# Altium PCB senior_board_rev1.PcbDoc
Units mil, origin at the board's own origin, x right, y up, seen from the top; angles counter-clockwise.
Board outline 6000 x 4000 mil, 2 copper layers (Top Layer, Bottom Layer); 323 components, 182 nets, 1254 pads, 8 vias.
Unrouted connection lines stored in the file: 718.
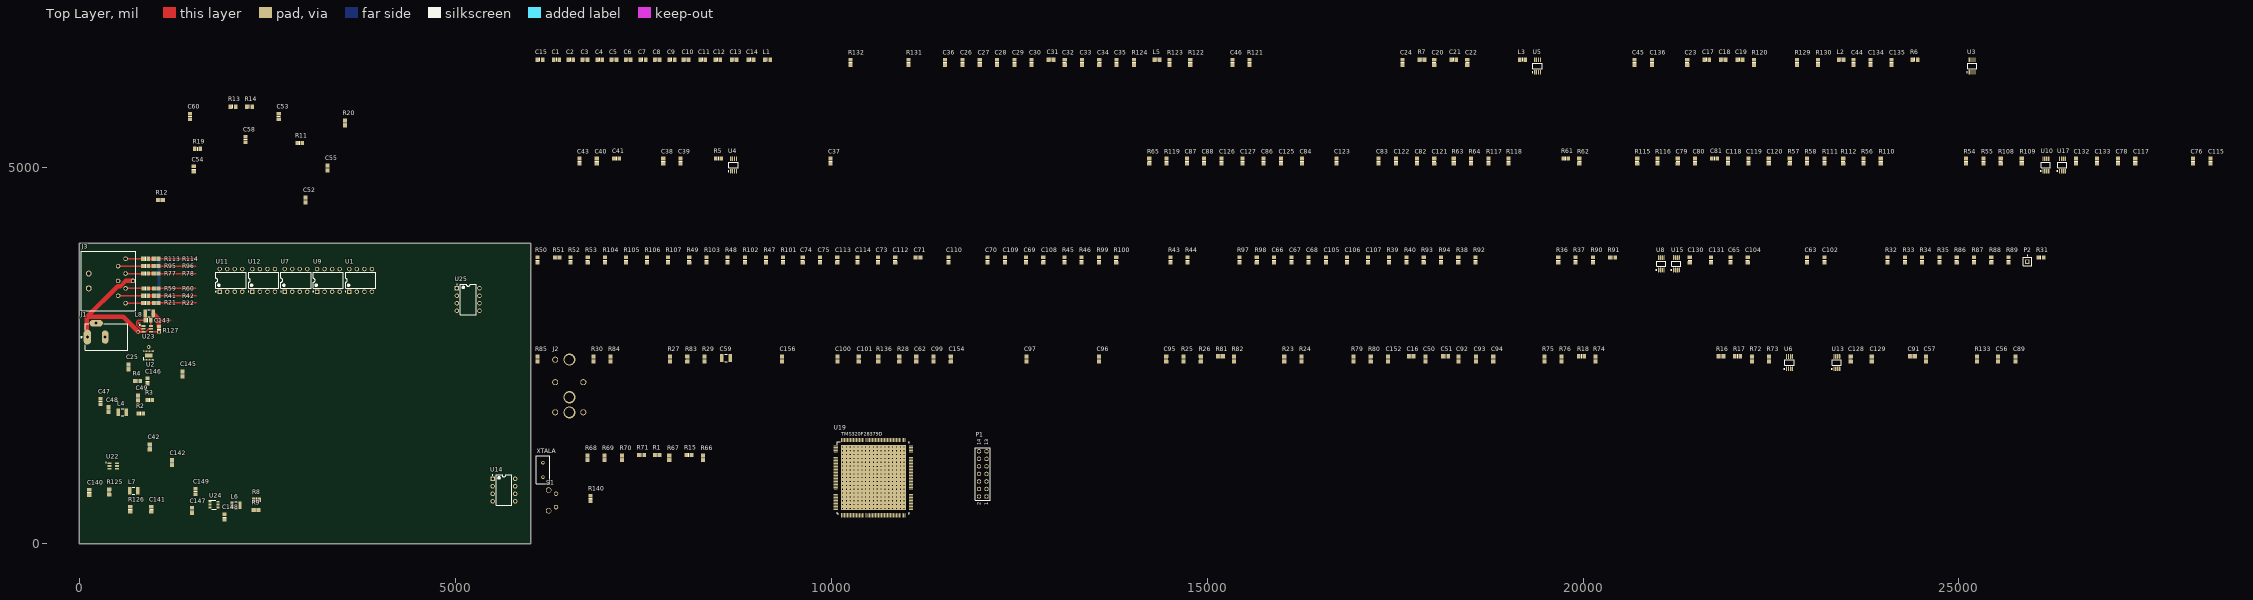
[diagram p0: Top Layer view]
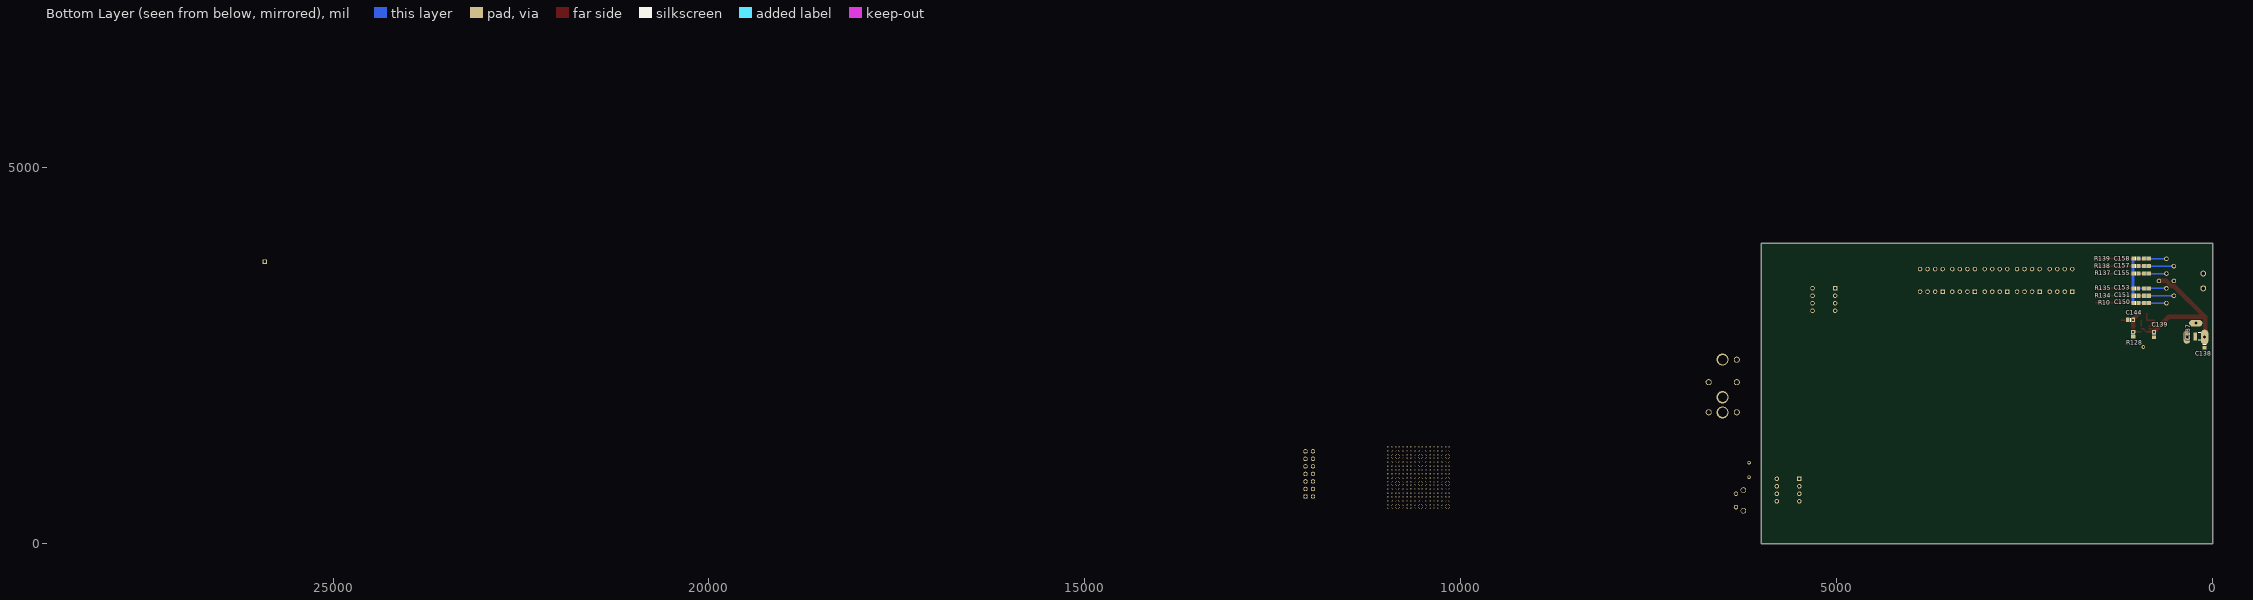
[diagram p1: Bottom Layer view, seen from below]

## Layer stack, top to bottom
Top Solder: solder mask 0.4, Solder Resist, Dk 3.5
Top Layer: signal copper 1.4
Dielectric 1: dielectric 12.6, FR-4, Dk 4.8
Bottom Layer: signal copper 1.4
Bottom Solder: solder mask 0.4, Solder Resist, Dk 3.5

## Board outline
0,0 6000,0 6000,4000 0,4000

## Design rules (kind name [scope] priority, off if disabled: settings)
Clearance [All] p1: gap=10 ignorepadtopadclearanceinfootprint=FALSE except(0: Arc-Hole Track-Hole SMDPad-Hole THPad-Hole Via-Hole Fill-Hole Poly-Hole Region-Hole Text-Hole; 5: SMDPad-SMDPad)
PolygonConnect [All] p1: connectstyle=Relief reliefconductorwidth=10 reliefentries=4 polygonreliefangle="90 Angle" airgapwidth=10
RoutingVias [All] p1: holewidth=28 width=50 viastyle="Through Hole" minholewidth=28 minwidth=50 maxholewidth=28 maxwidth=50
SolderMaskExpansion [All] p1: expansion=4
Width [All] p1: maxlimit=60 minlimit=10 preferedwidth=20 bottomlayer_minwidth=20 minimp=50.000000 maximp=50.000000 favimp=50.000000
30 further rules are at their usual default settings.

## Components (designator, comment, footprint, x,y, rotation, side; value= is the part's Value field where it differs from the comment)
C1 "Cap" 6-0805_N 6345,6440 r0 top value=10uF
C2 "Cap" 6-0805_N 6535,6440 r0 top value=10uF
C3 "Cap" 6-0805_N 6725,6440 r0 top value=100nF
C4 "Cap" 6-0805_N 6920,6440 r0 top value=100nF
C5 "Cap" 6-0805_N 7110,6440 r0 top value=100nF
C6 "Cap" 6-0805_N 7300,6440 r0 top value=100nF
C7 "Cap" 6-0805_N 7495,6440 r0 top value=100nF
C8 "Cap" 6-0805_N 7685,6440 r0 top value=100nF
C9 "Cap" 6-0805_N 7880,6440 r0 top value=100nF
C10 "Cap" 6-0805_N 8070,6440 r0 top value=100nF
C11 "Cap" 6-0805_N 8290,6440 r0 top value=100nF
C12 "Cap" 6-0805_N 8490,6440 r0 top value=100nF
C13 "Cap" 6-0805_N 8710,6440 r0 top value=100nF
C14 "Cap" 6-0805_N 8930,6440 r0 top value=100nF
C15 "Cap" 6-0805_N 6125,6440 r0 top value=10uF
C16 "Cap" 6-0805_N 17715,2495 r0 top value=470p
C17 "Cap" 6-0805_N 21645,6440 r0 top value=2.2uF
C18 "Cap" 6-0805_N 21865,6440 r0 top value=100nF
C19 "Cap" 6-0805_N 22085,6440 r0 top value=100nF
C20 "Cap" 6-0805_N 18020,6405 r90 top value=2.2uF
C21 "Cap" 6-0805_N 18280,6440 r0 top value=100nF
C22 "Cap" 6-0805_N 18460,6405 r90 top value=100nF
C23 "Cap" 6-0805_N 21385,6405 r90 top value=2.2uF
C24 "Cap" 6-0805_N 17600,6405 r90 top value=2.2uF
C25 "Cap" 6-0805_N 650,2354.57 r90 top value=6.8uF
C26 "Cap" 6-0805_N 11745,6405 r90 top value=10uF
C27 "Cap" 6-0805_N 11975,6405 r90 top value=2.2uF
C28 "Cap" 6-0805_N 12205,6405 r90 top value=2.2uF
C29 "Cap" 6-0805_N 12435,6405 r90 top value=2.2uF
C30 "Cap" 6-0805_N 12665,6405 r90 top value=2.2uF
C31 "Cap" 6-0805_N 12925,6440 r0 top value=2.2uF
C32 "Cap" 6-0805_N 13105,6405 r90 top value=2.2uF
C33 "Cap" 6-0805_N 13335,6405 r90 top value=2.2uF
C34 "Cap" 6-0805_N 13565,6405 r90 top value=2.2uF
C35 "Cap" 6-0805_N 13795,6405 r90 top value=2.2uF
C36 "Cap" 6-0805_N 11515,6405 r90 top value=22uF
C37 "Cap" 6-0805_N 9990,5090 r90 top value=100nF
C38 "Cap" 6-0805_N 7765,5090 r90 top value=2.2uF
C39 "Cap" 6-0805_N 7995,5090 r90 top value=100nF
C40 "Cap" 6-0805_N 6880,5090 r90 top value=1uF
C41 "Cap" 6-0805_N 7145,5125 r0 top value=1uF
C42 "Cap" 6-0805_N 935,1290 r90 top value=1uF
C43 "Cap" 6-0805_N 6650,5090 r90 top value=1uF
C44 "Cap" 6-0805_N 23595,6405 r90 top value=22uF
C45 "Cap" 6-0805_N 20685,6405 r90 top value=100nF
C46 "Cap" 6-0805_N 15335,6405 r90 top value=22uF
C47 "Cap" 6-0805_N 280,1895 r90 top value=22uF
C48 "Cap" 6-0805_N 385,1785 r90 top value=1uF
C49 "Cap" 6-0805_N 780,1940 r90 top value=33uF
C50 "Cap" 6-0805_N 17905,2460 r90 top value=1n
C51 "Cap" 6-0805_N 18170,2495 r0 top value=180p
C52 "Cap" 6-0805_N 3005,4575 r90 top value=10nF
C53 "Cap" 6-0805_N 2650,5685 r90 top value=10nF
C54 "Cap" 6-0805_N 1520,4985 r90 top value=8.2nF
C55 "Cap" 6-0805_N 3300,5000.43 r90 top value=18nF
C56 "Cap" 6-0805_N 25520,2460 r90 top value=100nF
C57 "Cap" 6-0805_N 24560,2460 r90 top value=8.2nF
C58 "Cap" 6-0805_N 2210,5380 r90 top value=100nF
C59 "Cap" C1210_N 8600,2470 r0 top value=1uF
C60 "Cap" 6-0805_N 1470,5685 r90 top value=100nF
C62 "Cap" 6-0805_N 11130,2460 r90 top value=220nF
C63 "Cap" 6-0805_N 22980,3775 r90 top value=100nF
C65 "Cap" 6-0805_N 21960,3775 r90 top value=100nF
C66 "Cap" 6-0805_N 15890,3775 r90 top value=470p
C67 "Cap" 6-0805_N 16120,3775 r90 top value=1n
C68 "Cap" 6-0805_N 16350,3775 r90 top value=180p
C69 "Cap" 6-0805_N 12590,3775 r90 top value=10nF
C70 "Cap" 6-0805_N 12080,3775 r90 top value=10nF
C71 "Cap" 6-0805_N 11155,3810 r0 top value=100nF
C73 "Cap" 6-0805_N 10620,3775 r90 top value=220nF
C74 "Cap" 6-0805_N 9620,3775 r90 top value=8.2nF
C75 "Cap" 6-0805_N 9850,3775 r90 top value=18nF
C76 "Cap" 6-0805_N 28115,5090 r90 top value=100nF
C78 "Cap" 6-0805_N 27115,5090 r90 top value=100nF
C79 "Cap" 6-0805_N 21260,5090 r90 top value=470p
C80 "Cap" 6-0805_N 21490,5090 r90 top value=1n
C81 "Cap" 6-0805_N 21750,5125 r0 top value=180p
C82 "Cap" 6-0805_N 17790,5090 r90 top value=10nF
C83 "Cap" 6-0805_N 17280,5090 r90 top value=10nF
C84 "Cap" 6-0805_N 16260,5090 r90 top value=100nF
C86 "Cap" 6-0805_N 15750,5090 r90 top value=220nF
C87 "Cap" 6-0805_N 14730,5090 r90 top value=8.2nF
C88 "Cap" 6-0805_N 14960,5090 r90 top value=18nF
C89 "Cap" 6-0805_N 25750,2460 r90 top value=100nF
C91 "Cap" 6-0805_N 24380,2495 r0 top value=100nF
C92 "Cap" 6-0805_N 18345,2460 r90 top value=470p
C93 "Cap" 6-0805_N 18575,2460 r90 top value=1n
C94 "Cap" 6-0805_N 18805,2460 r90 top value=180p
C95 "Cap" 6-0805_N 14455,2460 r90 top value=10nF
C96 "Cap" 6-0805_N 13560,2460 r90 top value=10nF
C97 "Cap" 6-0805_N 12595,2460 r90 top value=100nF
C99 "Cap" 6-0805_N 11360,2460 r90 top value=220nF
C100 "Cap" 6-0805_N 10085,2460 r90 top value=8.2nF
C101 "Cap" 6-0805_N 10365,2460 r90 top value=18nF
C102 "Cap" 6-0805_N 23210,3775 r90 top value=100nF
C104 "Cap" 6-0805_N 22190,3775 r90 top value=100nF
C105 "Cap" 6-0805_N 16580,3775 r90 top value=470p
C106 "Cap" 6-0805_N 16860,3775 r90 top value=1n
C107 "Cap" 6-0805_N 17140,3775 r90 top value=180p
C108 "Cap" 6-0805_N 12820,3775 r90 top value=10nF
C109 "Cap" 6-0805_N 12310,3775 r90 top value=10nF
C110 "Cap" 6-0805_N 11560,3775 r90 top value=100nF
C112 "Cap" 6-0805_N 10850,3775 r90 top value=220nF
C113 "Cap" 6-0805_N 10080,3775 r90 top value=8.2nF
C114 "Cap" 6-0805_N 10350,3775 r90 top value=18nF
C115 "Cap" 6-0805_N 28345,5090 r90 top value=100nF
C117 "Cap" 6-0805_N 27345,5090 r90 top value=100nF
C118 "Cap" 6-0805_N 21930,5090 r90 top value=470p
C119 "Cap" 6-0805_N 22200,5090 r90 top value=1n
C120 "Cap" 6-0805_N 22470,5090 r90 top value=180p
C121 "Cap" 6-0805_N 18020,5090 r90 top value=10nF
C122 "Cap" 6-0805_N 17510,5090 r90 top value=10nF
C123 "Cap" 6-0805_N 16720,5090 r90 top value=100nF
C125 "Cap" 6-0805_N 15980,5090 r90 top value=220nF
C126 "Cap" 6-0805_N 15190,5090 r90 top value=8.2nF
C127 "Cap" 6-0805_N 15470,5090 r90 top value=18nF
C128 "Cap" 6-0805_N 23560,2460 r90 top value=100nF
C129 "Cap" 6-0805_N 23840,2460 r90 top value=100nF
C130 "Cap" 6-0805_N 21420,3775 r90 top value=100nF
C131 "Cap" 6-0805_N 21700,3775 r90 top value=100nF
C132 "Cap" 6-0805_N 26555,5090 r90 top value=100nF
C133 "Cap" 6-0805_N 26835,5090 r90 top value=100nF
C134 "Cap" 6-0805_N 23825,6405 r90 top value=0.1uF
C135 "Cap" 6-0805_N 24105,6405 r90 top value=36pF
C136 "Cap" 6-0805_N 20915,6405 r90 top value=36pF
C137 "Cap Pol1" C1210_N 172.09,2760 r0 bottom value=1uF
C138 "Cap" 6-0805_N 104.37,2645 r90 bottom value=100nF
C139 "Cap" 6-0805_N 780,2785 r90 bottom value=10uF
C140 "Cap" 6-0805_N 130,685 r90 top value=100nF
C141 "Cap" 6-0805_N 955,460 r90 top value=47uF
C142 "Cap" 6-0805_N 1230,1080 r90 top value=10uF
C143 "Cap" 6-0805_N 910.43,2973.9 r180 top value=100nF
C144 "Cap" 6-0805_N 1090,2980 r180 bottom value=47uF
C145 "Cap" 6-0805_N 1370,2259.57 r90 top value=100nF
C146 "Cap" 6-0805_N 905,2165 r90 top value=1uF
C147 "Cap" 6-0805_N 1495,442.4 r90 top value=100nF
C148 "Cap" 6-0805_N 1930,356.97 r90 top value=10uF
C149 "Cap" 6-0805_N 1545,696.97 r90 top value=47uF
C150 "Cap" 6-0805_N 880,3205 r0 bottom value=1u
C151 "Cap" 6-0805_N 880,3300 r0 bottom value=1u
C152 "Cap" 6-0805_N 17405,2460 r90 top value=100nF
C153 "Cap" 6-0805_N 880.16,3398.43 r0 bottom value=1u
C154 "Cap" 6-0805_N 11590,2460 r90 top value=10u
C155 "Cap" 6-0805_N 880,3595 r0 bottom value=1u
C156 "Cap" 6-0805_N 9345,2460 r90 top value=100nF
C157 "Cap" 6-0805_N 880,3693.7 r0 bottom value=1u
C158 "Cap" 6-0805_N 880,3795 r0 bottom value=1u
J1 "PJ-002AH" CUI_PJ-002AH 104.37,2750 r0 top
J2 "SN37A12A" SN37A12A 6515,1750 r90 top
J3 "8 pin DIN CONN" "8 Pin DIN Conn" 22.87,3890.55 r270 top
L1 "Inductor" 6-0805_N 9150,6440 r0 top value=220R
L2 "Inductor" 6-0805_N 23435,6440 r0 top value=60R
L3 "Inductor" 6-0805_N 19195,6440 r0 top value=60R
L4 "Inductor" 14-1210 570,1750 r0 top value=4.7uH
L5 "Inductor" 6-0805_N 14335,6440 r0 top value=220R
L6 "Inductor" 14-1210 2081.85,512.4 r0 top value=2.2uH
L7 "Inductor" 14-1210 720,705 r0 top value=2.2uH
L8 "Inductor" 14-1210 926.85,3065 r0 top value=3.3uH
P1 "Header 7X2" HDR2X7 12065,630 r90 top
P2 "Jack Insert?" PIN1 25910,3755 r0 top
R1 "" 6-0805_N 7685,1180 r0 top value=4.8k
R2 "" 6-0805_N 815,1735 r0 top value=280k
R3 "" 6-0805_N 935,1915 r0 top value=102k
R4 "" 6-0805_N 770.43,2165 r0 top value=52.3k
R5 "" 6-0805_N 8500,5125 r0 top value=1k
R6 "" 6-0805_N 24415,6440 r0 top value=100mOhm
R7 "" 6-0805_N 17860,6440 r0 top value=100mOhm
R8 "" 6-0805_N 2355.43,587.4 r0 top value=5.62k
R9 "" 6-0805_N 2350,452.4 r0 top value=10k
R10 "" 6-0805_N 1020,3205 r0 bottom value=47k
R11 "" 6-0805_N 2930,5330 r0 top value=2.49k
R12 "" 6-0805_N 1075,4575 r0 top value=1.02k
R13 "" 6-0805_N 2040,5815 r0 top value=2.49k
R14 "" 6-0805_N 2260,5815 r0 top value=1.02k
R15 "" 6-0805_N 8105,1180 r0 top value=1.2k
R16 "" 6-0805_N 21835,2495 r0 top value=330
R17 "" 6-0805_N 22055,2495 r0 top value=12
R18 "" 6-0805_N 19980,2495 r0 top value=5
R19 "" 6-0805_N 1570,5255 r0 top value=12.1k
R20 "" 6-0805_N 3530,5600 r90 top value=3.57k
R21 "" 6-0805_N 880.43,3205 r0 top value=9.53k
R22 "" 6-0805_N 1020.43,3205 r0 top value=10k
R23 "" 6-0805_N 16025,2460 r90 top value=5
R24 "" 6-0805_N 16255,2460 r90 top value=12
R25 "" 6-0805_N 14685,2460 r90 top value=1.2k
R26 "" 6-0805_N 14915,2460 r90 top value=330
R27 "" 6-0805_N 7855,2460 r90 top value=4.8k
R28 "" 6-0805_N 10905,2460 r90 top value=10k
R29 "" 6-0805_N 8315,2460 r90 top value=10k
R30 "" 6-0805_N 6835,2460 r90 top value=1.2k
R31 "" 6-0805_N 26090,3810 r0 top value=4.8k
R32 "" 6-0805_N 24050,3775 r90 top value=2.49k
R33 "" 6-0805_N 24280,3775 r90 top value=1.02k
R34 "" 6-0805_N 24510,3775 r90 top value=2.49k
R35 "" 6-0805_N 24740,3775 r90 top value=1.02k
R36 "" 6-0805_N 19670,3775 r90 top value=330
R37 "" 6-0805_N 19900,3775 r90 top value=12
R38 "" 6-0805_N 18340,3775 r90 top value=5
R39 "" 6-0805_N 17420,3775 r90 top value=12.1k
R40 "" 6-0805_N 17650,3775 r90 top value=3.57k
R41 "" 6-0805_N 880.43,3300 r0 top value=9.53k
R42 "" 6-0805_N 1020.43,3300 r0 top value=10k
R43 "" 6-0805_N 14510,3775 r90 top value=5
R44 "" 6-0805_N 14740,3775 r90 top value=12
R45 "" 6-0805_N 13100,3775 r90 top value=1.2k
R46 "" 6-0805_N 13330,3775 r90 top value=330
R47 "" 6-0805_N 9130,3775 r90 top value=4.8k
R48 "" 6-0805_N 8620,3775 r90 top value=1.2k
R49 "" 6-0805_N 8110,3775 r90 top value=4.8k
R50 "" 6-0805_N 6090,3775 r90 top value=2.49k
R51 "" 6-0805_N 6355,3810 r0 top value=1.02k
R52 "" 6-0805_N 6530,3775 r90 top value=2.49k
R53 "" 6-0805_N 6760,3775 r90 top value=1.02k
R54 "" 6-0805_N 25095,5090 r90 top value=330
R55 "" 6-0805_N 25325,5090 r90 top value=12
R56 "" 6-0805_N 23730,5090 r90 top value=5
R57 "" 6-0805_N 22750,5090 r90 top value=12.1k
R58 "" 6-0805_N 22980,5090 r90 top value=3.57k
R59 "" 6-0805_N 880.59,3398.43 r0 top value=9.53k
R60 "" 6-0805_N 1020.59,3398.43 r0 top value=10k
R61 "" 6-0805_N 19770,5125 r0 top value=5
R62 "" 6-0805_N 19950,5090 r90 top value=12
R63 "" 6-0805_N 18280,5090 r90 top value=1.2k
R64 "" 6-0805_N 18510,5090 r90 top value=330
R65 "" 6-0805_N 14230,5090 r90 top value=4.8k
R66 "" 6-0805_N 8295,1145 r90 top value=1.2k
R67 "" 6-0805_N 7845,1145 r90 top value=4.8k
R68 "" 6-0805_N 6755,1145 r90 top value=2.49k
R69 "" 6-0805_N 6985,1145 r90 top value=1.02k
R70 "" 6-0805_N 7215,1145 r90 top value=2.49k
R71 "" 6-0805_N 7475,1180 r0 top value=1.02k
R72 "" 6-0805_N 22245,2460 r90 top value=330
R73 "" 6-0805_N 22475,2460 r90 top value=12
R74 "" 6-0805_N 20165,2460 r90 top value=5
R75 "" 6-0805_N 19485,2460 r90 top value=12.1k
R76 "" 6-0805_N 19715,2460 r90 top value=3.57k
R77 "" 6-0805_N 880,3595 r0 top value=9.53k
R78 "" 6-0805_N 1020,3595 r0 top value=10k
R79 "" 6-0805_N 16945,2460 r90 top value=5
R80 "" 6-0805_N 17175,2460 r90 top value=12
R81 "" 6-0805_N 15175,2495 r0 top value=1.2k
R82 "" 6-0805_N 15355,2460 r90 top value=330
R83 "" 6-0805_N 8085,2460 r90 top value=4.8k
R84 "" 6-0805_N 7065,2460 r90 top value=1.2k
R85 "" 6-0805_N 6090,2460 r90 top value=4.8k
R86 "" 6-0805_N 24970,3775 r90 top value=2.49k
R87 "" 6-0805_N 25200,3775 r90 top value=1.02k
R88 "" 6-0805_N 25430,3775 r90 top value=2.49k
R89 "" 6-0805_N 25660,3775 r90 top value=1.02k
R90 "" 6-0805_N 20130,3775 r90 top value=330
R91 "" 6-0805_N 20390,3810 r0 top value=12
R92 "" 6-0805_N 18570,3775 r90 top value=5
R93 "" 6-0805_N 17880,3775 r90 top value=12.1k
R94 "" 6-0805_N 18110,3775 r90 top value=3.57k
R95 "" 6-0805_N 880,3693.7 r0 top value=9.53k
R96 "" 6-0805_N 1020,3693.7 r0 top value=10k
R97 "" 6-0805_N 15430,3775 r90 top value=5
R98 "" 6-0805_N 15660,3775 r90 top value=12
R99 "" 6-0805_N 13560,3775 r90 top value=1.2k
R100 "" 6-0805_N 13790,3775 r90 top value=330
R101 "" 6-0805_N 9360,3775 r90 top value=4.8k
R102 "" 6-0805_N 8850,3775 r90 top value=1.2k
R103 "" 6-0805_N 8340,3775 r90 top value=4.8k
R104 "" 6-0805_N 6990,3775 r90 top value=2.49k
R105 "" 6-0805_N 7270,3775 r90 top value=1.02k
R106 "" 6-0805_N 7550,3775 r90 top value=2.49k
R107 "" 6-0805_N 7830,3775 r90 top value=1.02k
R108 "" 6-0805_N 25555,5090 r90 top value=330
R109 "" 6-0805_N 25835,5090 r90 top value=12
R110 "" 6-0805_N 23960,5090 r90 top value=5
R111 "" 6-0805_N 23210,5090 r90 top value=12.1k
R112 "" 6-0805_N 23460,5090 r90 top value=3.57k
R113 "" 6-0805_N 880,3792.13 r0 top value=9.53k
R114 "" 6-0805_N 1020,3792.13 r0 top value=10k
R115 "" 6-0805_N 20720,5090 r90 top value=5
R116 "" 6-0805_N 20990,5090 r90 top value=12
R117 "" 6-0805_N 18740,5090 r90 top value=1.2k
R118 "" 6-0805_N 19010,5090 r90 top value=330
R119 "" 6-0805_N 14460,5090 r90 top value=4.8k
R120 "" 6-0805_N 22275,6405 r90 top value=1M
R121 "" 6-0805_N 15565,6405 r90 top value=2.2k
R122 "" 6-0805_N 14775,6405 r90 top value=100
R123 "" 6-0805_N 14500,6405 r90 top value=4.7k
R124 "" 6-0805_N 14025,6405 r90 top value=4.7k
R125 "" 6-0805_N 395,690 r90 top value=34k
R126 "" 6-0805_N 675,460 r90 top value=10k
R127 "" 6-0805_N 1055.43,2855 r90 top value=56.2k
R128 "" 6-0805_N 1055,2788.7 r90 bottom value=10k
R129 "" 6-0805_N 22845,6405 r90 top value=10k
R130 "" 6-0805_N 23125,6405 r90 top value=10k
R131 "" 6-0805_N 11025,6405 r90 top value=10k
R132 "" 6-0805_N 10255,6405 r90 top value=10k
R133 "" 6-0805_N 25240,2460 r90 top value=11k
R134 "" 6-0805_N 1020,3300 r0 bottom value=47k
R135 "" 6-0805_N 1020.59,3398.43 r0 bottom value=47k
R136 "" 6-0805_N 10625,2460 r90 top value=11k
R137 "" 6-0805_N 1020,3595 r0 bottom value=47k
R138 "" 6-0805_N 1020,3695 r0 bottom value=47k
R139 "" 6-0805_N 1020,3795 r0 bottom value=47k
R140 "" 6-0805_N 6795,605 r90 top value=9.53k
S1 "B3F-3152" B3F-3152 6338.43,489.06 r90 top
U1 "NE5532P" TI-P8 3740,3505 r90 top
U2 "TPS63710DRR" DRR0012C 920,2505 r90 top value=Value
U3 "OPA350EA/250" TI-DGK8_N 25175,6355 r90 top
U4 "REF5030IDGKT" TI-DGK8_N 8700,5040 r90 top
U5 "OPA350EA/250" TI-DGK8_N 19395,6355 r90 top
U6 "THS4531IDGKR" TI-DGK8_N 22745,2410 r90 top
U7 "NE5532P" TI-P8 2880,3505 r90 top
U8 "THS4531IDGKR" TI-DGK8_N 21040,3725 r90 top
U9 "NE5532P" TI-P8 3310,3505 r90 top
U10 "THS4531IDGKR" TI-DGK8_N 26155,5040 r90 top
U11 "NE5532P" TI-P8 2015,3505 r90 top
U12 "NE5532P" TI-P8 2450,3505 r90 top
U13 "THS4531IDGKR" TI-DGK8_N 23375,2410 r90 top
U14 "NE5532P" TI-P8 5645,715.43 r0 top
U15 "THS4531IDGKR" TI-DGK8_N 21240,3725 r90 top
U17 "THS4531IDGKR" TI-DGK8_N 26375,5040 r90 top
U19 "TMS320F28379DPTP" PTP0176F_N 10560,880 r0 top value=Value
U22 "TPS563200DDCR" SOT95P280X110-6N 450,1035 r0 top
U23 "TPS563200DDCR" SOT95P280X110-6N 900,2860 r0 top
U24 "TPS561208DDCR" DDC0006A 1790,522.4 r0 top value=Value
U25 "NE5532P" TI-P8 5170,3250 r0 top
XTALA "ATS100B-E" "ATS XTAL" 6165,887.87 r90 top

## Footprints (in the part's own frame and the unit in brackets; to place one, negate y for a bottom-side part, rotate by r counter-clockwise, add the part's x,y. Pads: shape width x height; smd on the part's side, far side on the other; paste and mask are expansions set on the pad)
6-0805_N [mm] "Chip Resistor, Body 2.0x1.2mm, IPC Medium Density"
  rect 1.2x1.4 smd: 1(-0.9,0) 2(0.9,0)
  silkscreen extent 0,-0.6 0,0.6, body extent -1.07,-0.7 1.07,0.7, height 0.7
"8 Pin DIN Conn" [mm]
  round 2 hole 1.3: 1(7.5,2.54) 2(12.5,2.54)
  round 1.524 hole 1: 3(5,12.5) 4(10,12.5) 5(15,12.5) 6(2.5,15) 7(7.5,15) 8(12.5,15) 9(17.5,15) 10(10,17.5)
  silkscreen extent 0,0 20,18.5
14-1210 [mm] "Chip Resistor, Body 3.2x2.5mm, IPC High Density"
  rect 1.1x2.6 smd: 1(-1.35,0) 2(1.35,0)
  silkscreen extent -0.4,-1.2 0.4,1.2, body extent -1.68,-1.32 1.68,1.32, height 0.9
"ATS XTAL" [mm]
  round 1.2 hole 0.7: 1(0,0) 2(4.88,0)
  silkscreen extent -2.25,-2.25 7.13,2.25
B3F-3152 [mm]
  round 1.524 hole 1: 1(0,0) 2(4.5,0)
  round 1.9 hole 1.5: 3(-1.25,2.5) 4(5.75,2.5)
C1210_N [mm] "Chip Capacitor, Body 3.2x2.5mm, IPC Medium Density"
  rect 1.3x2.7 smd: 1(-1.45,0) 2(1.45,0)
  silkscreen extent -0.4,-1.25 0.4,1.25, body extent -1.7,-1.35 1.7,1.35, height 1.5
CUI_PJ-002AH [mm]
  oval 2.5x5 hole 1: 1(0,0)
  oval 2.25x4.5 hole 1: 2(6,0)
  oval 4.5x2.25 hole 1: 3(3,4.7)
  silkscreen extent -2.2,-4.5 13.7,4.5
DDC0006A [mm]
  rect 1x0.6 smd paste+0 mask+0.051: 1(-1.375,0.95) 2(-1.375,0) 3(-1.375,-0.95) 4(1.375,-0.95) 5(1.375,0) 6(1.375,0.95)
  silkscreen extent -1.75,-1.52 0.7,1.53, body extent 0,0 0.25,0.25, height 0.25
DRR0012C [mm]
  rect 0.5x0.25 smd paste+0 mask+0.051: 1(-1.45,1.25) 2(-1.45,0.75) 3(-1.45,0.25) 4(-1.45,-0.25) 5(-1.45,-0.75) 6(-1.45,-1.25) 7(1.45,-1.25) 8(1.45,-0.75) 9(1.45,-0.25) 10(1.45,0.25) 11(1.45,0.75) 12(1.45,1.25)
  rect 1.5x2.5 smd paste-1.237 mask+0.051: 13(0,0)
  silkscreen extent -1.6,-1.65 1.6,1.65, body extent 0,0 0.25,0.25, height 0.25
HDR2X7 [mm] "Connector; Header; 7x2 Position"
  rect 1.5x1.5 hole 0.9: 1(0,0)
  round 1.5 hole 0.9: 2(0,2.54) 3(2.54,0) 4(2.54,2.54) 5(5.08,0) 6(5.08,2.54) 7(7.62,0) 8(7.62,2.54) 9(10.16,0) 10(10.16,2.54) 11(12.7,0) 12(12.7,2.54) 13(15.24,0) 14(15.24,2.54)
  silkscreen extent -1.27,-1.27 16.51,3.81
PIN1 [mm] "Connector; Plug"
  rect 1.5x1.5 hole 0.9: 1(0,0)
  silkscreen extent -1.4,-1.4 1.4,2.17
PTP0176F_N [mm]
  oval 1.45x0.3 smd paste+0 mask+0.051: 1(-12.725,10.75) 2(-12.725,10.25) 3(-12.725,9.75) 4(-12.725,9.25) 5(-12.725,8.75) 6(-12.725,8.25) 7(-12.725,7.75) 8(-12.725,7.25) 9(-12.725,6.75) 10(-12.725,6.25) 11(-12.725,5.75) 12(-12.725,5.25) 13(-12.725,4.75) 14(-12.725,4.25) 15(-12.725,3.75) 16(-12.725,3.25) 17(-12.725,2.75) 18(-12.725,2.25) 19(-12.725,1.75) 20(-12.725,1.25) 21(-12.725,0.75) 22(-12.725,0.25) 23(-12.725,-0.25) 24(-12.725,-0.75) 25(-12.725,-1.25) 26(-12.725,-1.75) 27(-12.725,-2.25) 28(-12.725,-2.75) 29(-12.725,-3.25) 30(-12.725,-3.75) 31(-12.725,-4.25) 32(-12.725,-4.75) 33(-12.725,-5.25) 34(-12.725,-5.75) 35(-12.725,-6.25) 36(-12.725,-6.75) 37(-12.725,-7.25) 38(-12.725,-7.75) 39(-12.725,-8.25) 40(-12.725,-8.75) 41(-12.725,-9.25) 42(-12.725,-9.75) 43(-12.725,-10.25) 44(-12.725,-10.75) 89(12.725,-10.75) 90(12.725,-10.25) 91(12.725,-9.75) 92(12.725,-9.25) 93(12.725,-8.75) 94(12.725,-8.25) 95(12.725,-7.75) 96(12.725,-7.25) 97(12.725,-6.75) 98(12.725,-6.25) 99(12.725,-5.75) 100(12.725,-5.25) 101(12.725,-4.75) 102(12.725,-4.25) 103(12.725,-3.75) 104(12.725,-3.25) 105(12.725,-2.75) 106(12.725,-2.25) 107(12.725,-1.75) 108(12.725,-1.25) 109(12.725,-0.75) 110(12.725,-0.25) 111(12.725,0.25) 112(12.725,0.75) 113(12.725,1.25) 114(12.725,1.75) 115(12.725,2.25) 116(12.725,2.75) 117(12.725,3.25) 118(12.725,3.75) 119(12.725,4.25) 120(12.725,4.75) 121(12.725,5.25) 122(12.725,5.75) 123(12.725,6.25) 124(12.725,6.75) 125(12.725,7.25) 126(12.725,7.75) 127(12.725,8.25) 128(12.725,8.75) 129(12.725,9.25) 130(12.725,9.75) 131(12.725,10.25) 132(12.725,10.75)
  oval 0.3x1.45 smd paste+0 mask+0.051: 45(-10.75,-12.725) 46(-10.25,-12.725) 47(-9.75,-12.725) 48(-9.25,-12.725) 49(-8.75,-12.725) 50(-8.25,-12.725) 51(-7.75,-12.725) 52(-7.25,-12.725) 53(-6.75,-12.725) 54(-6.25,-12.725) 55(-5.75,-12.725) 56(-5.25,-12.725) 57(-4.75,-12.725) 58(-4.25,-12.725) 59(-3.75,-12.725) 60(-3.25,-12.725) 61(-2.75,-12.725) 62(-2.25,-12.725) 63(-1.75,-12.725) 64(-1.25,-12.725) 65(-0.75,-12.725) 66(-0.25,-12.725) 67(0.25,-12.725) 68(0.75,-12.725) 69(1.25,-12.725) 70(1.75,-12.725) 71(2.25,-12.725) 72(2.75,-12.725) 73(3.25,-12.725) 74(3.75,-12.725) 75(4.25,-12.725) 76(4.75,-12.725) 77(5.25,-12.725) 78(5.75,-12.725) 79(6.25,-12.725) 80(6.75,-12.725) 81(7.25,-12.725) 82(7.75,-12.725) 83(8.25,-12.725) 84(8.75,-12.725) 85(9.25,-12.725) 86(9.75,-12.725) 87(10.25,-12.725) 88(10.75,-12.725) 133(10.75,12.725) 134(10.25,12.725) 135(9.75,12.725) 136(9.25,12.725) 137(8.75,12.725) 138(8.25,12.725) 139(7.75,12.725) 140(7.25,12.725) 141(6.75,12.725) 142(6.25,12.725) 143(5.75,12.725) 144(5.25,12.725) 145(4.75,12.725) 146(4.25,12.725) 147(3.75,12.725) 148(3.25,12.725) 149(2.75,12.725) 150(2.25,12.725) 151(1.75,12.725) 152(1.25,12.725) 153(0.75,12.725) 154(0.25,12.725) 155(-0.25,12.725) 156(-0.75,12.725) 157(-1.25,12.725) 158(-1.75,12.725) 159(-2.25,12.725) 160(-2.75,12.725) 161(-3.25,12.725) 162(-3.75,12.725) 163(-4.25,12.725) 164(-4.75,12.725) 165(-5.25,12.725) 166(-5.75,12.725) 167(-6.25,12.725) 168(-6.75,12.725) 169(-7.25,12.725) 170(-7.75,12.725) 171(-8.25,12.725) 172(-8.75,12.725) 173(-9.25,12.725) 174(-9.75,12.725) 175(-10.25,12.725) 176(-10.75,12.725)
  rect 22x22 smd paste-10.987 mask+0.051: 177(0,0)
  round 0.5 / inner round 1.524 / far side round 0.5 hole 0.203 mask+0.051: V(-10.4,-10.4) V(-10.4,-9.1) V(-10.4,-7.8) V(-10.4,-6.5) V(-10.4,-5.2) V(-10.4,-3.9) V(-10.4,-2.6) V(-10.4,-1.3) V(-10.4,0) V(-10.4,1.3) V(-10.4,2.6) V(-10.4,3.9) V(-10.4,5.2) V(-10.4,6.5) V(-10.4,7.8) V(-10.4,9.1) V(-10.4,10.4) V(-9.1,-10.4) V(-9.1,-9.1) V(-9.1,-7.8) V(-9.1,-6.5) V(-9.1,-5.2) V(-9.1,-3.9) V(-9.1,-2.6) V(-9.1,-1.3) V(-9.1,0) V(-9.1,1.3) V(-9.1,2.6) V(-9.1,3.9) V(-9.1,5.2) V(-9.1,6.5) V(-9.1,7.8) V(-9.1,9.1) V(-9.1,10.4) V(-7.8,-10.4) V(-7.8,-9.1) V(-7.8,-7.8) V(-7.8,-6.5) V(-7.8,-5.2) V(-7.8,-3.9) V(-7.8,-2.6) V(-7.8,-1.3) V(-7.8,0) V(-7.8,1.3) V(-7.8,2.6) V(-7.8,3.9) V(-7.8,5.2) V(-7.8,6.5) V(-7.8,7.8) V(-7.8,9.1) V(-7.8,10.4) V(-6.5,-10.4) V(-6.5,-9.1) V(-6.5,-7.8) V(-6.5,-6.5) V(-6.5,-5.2) V(-6.5,-3.9) V(-6.5,-2.6) V(-6.5,-1.3) V(-6.5,0) V(-6.5,1.3) V(-6.5,2.6) V(-6.5,3.9) V(-6.5,5.2) V(-6.5,6.5) V(-6.5,7.8) V(-6.5,9.1) V(-6.5,10.4) V(-5.2,-10.4) V(-5.2,-9.1) V(-5.2,-7.8) V(-5.2,-6.5) V(-5.2,-5.2) V(-5.2,-3.9) V(-5.2,-2.6) V(-5.2,-1.3) V(-5.2,0) V(-5.2,1.3) V(-5.2,2.6) V(-5.2,3.9) V(-5.2,5.2) V(-5.2,6.5) V(-5.2,7.8) V(-5.2,9.1) V(-5.2,10.4) V(-3.9,-10.4) V(-3.9,-9.1) V(-3.9,-7.8) V(-3.9,-6.5) V(-3.9,-5.2) V(-3.9,-3.9) V(-3.9,-2.6) V(-3.9,-1.3) V(-3.9,0) V(-3.9,1.3) V(-3.9,2.6) V(-3.9,3.9) V(-3.9,5.2) V(-3.9,6.5) V(-3.9,7.8) V(-3.9,9.1) V(-3.9,10.4) V(-2.6,-10.4) V(-2.6,-9.1) V(-2.6,-7.8) V(-2.6,-6.5) V(-2.6,-5.2) V(-2.6,-3.8) V(-2.6,-2.6) V(-2.6,-1.3) V(-2.6,0) V(-2.6,1.3) V(-2.6,2.6) V(-2.6,3.8) V(-2.6,5.2) V(-2.6,6.5) V(-2.6,7.8) V(-2.6,9.1) V(-2.6,10.4) V(-1.3,-10.4) V(-1.3,-9.1) V(-1.3,-7.8) V(-1.3,-6.5) V(-1.3,-5.2) V(-1.3,-3.8) V(-1.3,-2.6) V(-1.3,-1.3) V(-1.3,0) V(-1.3,1.3) V(-1.3,2.6) V(-1.3,3.8) V(-1.3,5.2) V(-1.3,6.5) V(-1.3,7.8) V(-1.3,9.1) V(-1.3,10.4) V(0,-10.4) V(0,-9.1) V(0,-7.8) V(0,-6.5) V(0,-5.2) V(0,-3.8) V(0,-2.6) V(0,-1.3) V(0,0) V(0,1.3) V(0,2.6) V(0,3.8) V(0,5.2) V(0,6.5) V(0,7.8) V(0,9.1) V(0,10.4) V(1.3,-10.4) V(1.3,-9.1) V(1.3,-7.8) V(1.3,-6.5) V(1.3,-5.2) V(1.3,-3.8) V(1.3,-2.6) V(1.3,-1.3) V(1.3,0) V(1.3,1.3) V(1.3,2.6) V(1.3,3.8) V(1.3,5.2) V(1.3,6.5) V(1.3,7.8) V(1.3,9.1) V(1.3,10.4) V(2.6,-10.4) V(2.6,-9.1) V(2.6,-7.8) V(2.6,-6.5) V(2.6,-5.2) V(2.6,-3.8) V(2.6,-2.6) V(2.6,-1.3) V(2.6,0) V(2.6,1.3) V(2.6,2.6) V(2.6,3.8) V(2.6,5.2) V(2.6,6.5) V(2.6,7.8) V(2.6,9.1) V(2.6,10.4) V(3.9,-10.4) V(3.9,-9.1) V(3.9,-7.8) V(3.9,-6.5) V(3.9,-5.2) V(3.9,-3.9) V(3.9,-2.6) V(3.9,-1.3) V(3.9,0) V(3.9,1.3) V(3.9,2.6) V(3.9,3.9) V(3.9,5.2) V(3.9,6.5) V(3.9,7.8) V(3.9,9.1) V(3.9,10.4) V(5.2,-10.4) V(5.2,-9.1) V(5.2,-7.8) V(5.2,-6.5) V(5.2,-5.2) V(5.2,-3.9) V(5.2,-2.6) V(5.2,-1.3) V(5.2,0) V(5.2,1.3) V(5.2,2.6) V(5.2,3.9) V(5.2,5.2) V(5.2,6.5) V(5.2,7.8) V(5.2,9.1) V(5.2,10.4) V(6.5,-10.4) V(6.5,-9.1) V(6.5,-7.8) V(6.5,-6.5) V(6.5,-5.2) V(6.5,-3.9) V(6.5,-2.6) V(6.5,-1.3) V(6.5,0) V(6.5,1.3) V(6.5,2.6) V(6.5,3.9) V(6.5,5.2) V(6.5,6.5) V(6.5,7.8) V(6.5,9.1) V(6.5,10.4) V(7.8,-10.4) V(7.8,-9.1) V(7.8,-7.8) V(7.8,-6.5) V(7.8,-5.2) V(7.8,-3.9) V(7.8,-2.6) V(7.8,-1.3) V(7.8,0) V(7.8,1.3) V(7.8,2.6) V(7.8,3.9) V(7.8,5.2) V(7.8,6.5) V(7.8,7.8) V(7.8,9.1) V(7.8,10.4) V(9.1,-10.4) V(9.1,-9.1) V(9.1,-7.8) V(9.1,-6.5) V(9.1,-5.2) V(9.1,-3.9) V(9.1,-2.6) V(9.1,-1.3) V(9.1,0) V(9.1,1.3) V(9.1,2.6) V(9.1,3.9) V(9.1,5.2) V(9.1,6.5) V(9.1,7.8) V(9.1,9.1) V(9.1,10.4) V(10.4,-10.4) V(10.4,-9.1) V(10.4,-7.8) V(10.4,-6.5) V(10.4,-5.2) V(10.4,-3.9) V(10.4,-2.6) V(10.4,-1.3) V(10.4,0) V(10.4,1.3) V(10.4,2.6) V(10.4,3.9) V(10.4,5.2) V(10.4,6.5) V(10.4,7.8) V(10.4,9.1) V(10.4,10.4)
  silkscreen extent -12.2,-12.2 12.2,12.2, body extent 0,0 0.25,0.25, height 0.25
SN37A12A [mil]
  round 80 hole 57: R(400,187) RB(400,-187) S(700,187) T(0,187) TB(0,-187)
SOT95P280X110-6N [mm]
  rect 1.3x0.6 smd: 1(-1.255,0.95) 2(-1.255,0) 3(-1.255,-0.95) 4(1.255,-0.95) 5(1.255,0) 6(1.255,0.95)
  silkscreen extent -2.6,1.15 -2.4,1.35
TI-DGK8_N [mm] "SOP, 8-Leads, Body 3x3mm, Pitch 0.65mm, IPC Medium Density"
  oval 1.6x0.4 smd: 1(-2.1,0.975) 2(-2.1,0.325) 3(-2.1,-0.325) 4(-2.1,-0.975) 5(2.1,-0.975) 6(2.1,-0.325) 7(2.1,0.325) 8(2.1,0.975)
  silkscreen extent -2.22,-1.55 0.9,1.85, body extent -1.55,-1.55 1.55,1.55, height 1.1
TI-P8 [mm] "DIP, 8-Leads, Body 9.59x6.35mm, Pitch 2.54mm"
  rect 1.5x1.5 hole 0.9: 1(-3.81,3.81)
  round 1.5 hole 0.9: 2(-3.81,1.27) 3(-3.81,-1.27) 4(-3.81,-3.81) 5(3.81,-3.81) 6(3.81,-1.27) 7(3.81,1.27) 8(3.81,3.81)
  silkscreen extent -3.93,-5.1 2.65,5.23, body extent -3.95,-5.07 3.95,5.07, height 5.08

## Part data
C1 C2 C3 C4 C5 C6 C7 C8 C9 C10 C11 C12 C13 C14 C15 C16 C17 C18 C19 C20 C21 C22 C23 C24 C25 C26 C27 C28 C29 C30 C31 C32 C33 C34 C35 C36 C37 C38 C39 C40 C41 C42 C43 C44 C45 C46 C47 C48 C49 C50 C51 C52 C53 C54 C55 C56 C57 C58 C59 C60 C62 C63 C65 C66 C67 C68 C69 C70 C71 C73 C74 C75 C76 C78 C79 C80 C81 C82 C83 C84 C86 C87 C88 C89 C91 C92 C93 C94 C95 C96 C97 C99 C100 C101 C102 C104 C105 C106 C107 C108 C109 C110 C112 C113 C114 C115 C117 C118 C119 C120 C121 C122 C123 C125 C126 C127 C128 C129 C130 C131 C132 C133 C134 C135 C136 C138 C139 C140 C141 C142 C143 C144 C145 C146 C147 C148 C149 C150 C151 C152 C153 C154 C155 C156 C157 C158: "Capacitor", LatestRevisionDate=17-Jul-2002, LatestRevisionNote="Re-released for DXP Platform.", PackageDescription="Radial Cap, Thru-Hole; 2 Leads; 0.3 in Pin Spacing", PackageReference=RAD-0.3, Published=8-Jun-2000, Publisher="Altium Limited"
C137: "Polarized Capacitor (Radial)", LatestRevisionDate=17-Jul-2002, LatestRevisionNote="Re-released for DXP Platform.", PackageDescription="Polarized Capacitor (Radial); 2 Leads", PackageReference=RB7.6-15, Published=8-Jun-2000, Publisher="Altium Limited"
P1: "Header, 7-Pin, Dual row", LatestRevisionDate=17-Jul-2002, LatestRevisionNote="Re-released for DXP Platform.", Publisher="Altium Limited"
P2: library part Plug, "Plug", LatestRevisionDate=17-Jul-2002, LatestRevisionNote="Re-released for DXP Platform.", Publisher="Altium Limited"
R1 R2 R3 R4 R5 R6 R7 R8 R9 R10 R11 R12 R13 R14 R15 R16 R17 R18 R19 R20 R21 R22 R23 R24 R25 R26 R27 R28 R29 R30 R31 R32 R33 R34 R35 R36 R37 R38 R39 R40 R41 R42 R43 R44 R45 R46 R47 R48 R49 R50 R51 R52 R53 R54 R55 R56 R57 R58 R59 R60 R61 R62 R63 R64 R65 R66 R67 R68 R69 R70 R71 R72 R73 R74 R75 R76 R77 R78 R79 R80 R81 R82 R83 R84 R85 R86 R87 R88 R89 R90 R91 R92 R93 R94 R95 R96 R97 R98 R99 R100 R101 R102 R103 R104 R105 R106 R107 R108 R109 R110 R111 R112 R113 R114 R115 R116 R117 R118 R119 R120 R121 R122 R123 R124 R125 R126 R127 R128 R129 R130 R131 R132 R133 R134 R135 R136 R137 R138 R139 R140: library part Res3, "Resistor", LatestRevisionDate=29-May-2009, LatestRevisionNote="IPC-7351 Footprint Added.", PackageDescription="Chip Resistor", PackageReference=J1-0603, Published=8-Jun-2000, Publisher="Altium Limited"
U1 U7 U9 U11 U12 U14 U25: "Dual Low-Noise High-Speed Audio Operational Amplifier, 10 to 30 V, 0 to 70 degC, 8-pin DIP (P8), Pb-Free (RoHS)", Manufacturer="Texas Instruments", Supplier Part Number 1=296-1410-5-ND, Total Supply Voltage(Max)(+5V is 5, +/-5V is 10)=30, Total Supply Voltage(Min)(+5V is 5, +/-5V is 10)=10, CMRR(Min)(dB)=70, Code_JEDEC=MS-001, ComponentLink1Description="Manufacturer URL", ComponentLink1URL=http://www.ti.com/, ComponentLink2Description=Datasheet, ComponentLink2URL=http://www.ti.com/lit/ds/symlink/ne5532.pdf, ComponentLink3Description="Package Specification", ComponentLink3URL=http://www.ti.com/litv/pdf/mpdi001b, DatasheetVersion=SLOS075I, Eco-Plan="Pb-Free (RoHS)", GBW(Typ)(MHz)=10, IIB(Max)(pA)=800000, Iq per channel(Max)(mA)=4, Mounting Technology="Through Hole", Number of Channels=2, PackageDescription="8-Pin Plastic In-Line, Body 9.59 x 6.35 mm, Pitch 2.54 mm", PackageReference=P8, PackageVersion="4040082/E, 04/2010", PartNumber=NE5532P, Slew Rate(Typ)(V/us)=9, Sub Family="General Purpose Amplifier, High Supply Voltage Amplifier (>=30V), Low Noise Amp (<=10nV/rtHz)", Supplier 1=Digi-Key, Supplier 2=Farnell, Supplier 3=Farnell, Supplier 4=Newark, Supplier 5=Mouser, Supplier Part Number 2=1106092, Supplier Part Number 3=2119505, Supplier Part Number 4=59K8751, Supplier Part Number 5=595-NE5532P, Vio (25C)(Max)(mV)=4, Vn at 1kHz(Typ)(nV/rtHz)=5
U2 U24: "Imported", Manufacturer="Texas Instruments", Manufacturer_Name="Texas Instruments", RefDes=RefDes, TYPE=TYPE
  U2: Manufacturer_Part_Number=TPS63710DRR, PartNumber=TPS63710DRR
  U24: Manufacturer_Part_Number=TPS561208DDCR, PartNumber=TPS561208DDCR
U3 U5: "High-Speed, Single-Supply, Rail-to-Rail Operational Amplifier MicroAmplifier(TM) Series, 2.7 to 5.5 V, -40 to 85 degC, 8-pin SOP (DGK8), Green (RoHS & no Sb/Br)", Manufacturer="Texas Instruments", Supplier Part Number 1=OPA350EATR-ND, Total Supply Voltage(Max)(+5V is 5, +/-5V is 10)=5.5, Total Supply Voltage(Min)(+5V is 5, +/-5V is 10)=2.7, CMRR(Min)(dB)=66, Code_JEDEC=MO-187, ComponentLink1Description="Manufacturer URL", ComponentLink1URL=http://www.ti.com/, ComponentLink2Description=Datasheet, ComponentLink2URL=http://www.ti.com/general/docs/lit/getliterature.tsp?genericPartNumber=OPA350&fileType=pdf, ComponentLink3Description="Package Specification", ComponentLink3URL=http://www.ti.com/litv/pdf/mpds028d, DatasheetVersion=SBOS099C, Eco-Plan="Green (RoHS & no Sb/Br)", IIB(Max)(pA)=10, Iq per channel(Max)(mA)=8.5, Mounting Technology="Surface Mount", Number of Channels=1, Offset Drift(Typ)(uV/C)=4, PackageDescription="8-Pin Thin Small Outline, Body 3 x 3 mm, Pitch 0.65 mm", PackageReference=DGK8, PackageVersion="4073329/E, 05/2006", PartNumber=OPA350EA/250, Slew Rate(Typ)(V/us)=22, Sub Family="Low Input Bias Current Amp (<=10pA), Low Offset Voltage Amplifier (<=500uV), Low Supply Voltage Amplifier (<=2.7V), Precision Amplifier", Supplier 1=Digi-Key, Supplier 2=Digi-Key, Supplier 3=Digi-Key, Supplier 4=Farnell, Supplier 5=Newark, Supplier 6=Mouser, Supplier Part Number 2=OPA350EACT-ND, Supplier Part Number 3=OPA350EADKR-ND, Supplier Part Number 4=9547568, Supplier Part Number 5=75C4899, Supplier Part Number 6=595-OPA350EA/250, Vio (25C)(Max)(mV)=1, Vn at 1kHz(Typ)(nV/rtHz)=18
U4: "Low Noise, Very Low Drift, Precision Voltage Reference, -40 to 125 degC, 8-pin MSOP (DGK), Green (RoHS & no Sb/Br)", Manufacturer="Texas Instruments", Rating=Catalog, Supplier Part Number 1=296-24501-2-ND, Temp Coeff(Max)(ppm/ degree C)=3, Code_JEDEC=MO-187, ComponentLink1Description="Manufacturer URL", ComponentLink1URL=http://www.ti.com/, ComponentLink2Description=Datasheet, ComponentLink2URL=http://www.ti.com/general/docs/lit/getliterature.tsp?genericPartNumber=REF5030&fileType=pdf, ComponentLink3Description="Package Specification", ComponentLink3URL=http://www.ti.com/litv/pdf/mpds028d, DatasheetVersion=SBOS410E, Eco-Plan="Green (RoHS & no Sb/Br)", Initial Accuracy @ 25/deg C(%)=0.05, Iout/Iz(Max)(mA)=10, Iq(Max)(uA)=1000, Mounting Technology="Surface Mount", PackageDescription="8-Pin Thin Small Outline Package 3 x 3 mm Body ,0.65 mm Pitch", PackageReference=DGK8, PackageVersion=4073329/E, PartNumber=REF5030IDGKT, SubFamily="Series Voltage Reference", Supplier 1=Digi-Key, Supplier 2=Digi-Key, Supplier 3=Digi-Key, Supplier 4=Newark, Supplier 5=Mouser, Supplier Part Number 2=296-24501-1-ND, Supplier Part Number 3=296-24501-6-ND, Supplier Part Number 4=24R9921, Supplier Part Number 5=595-REF5030IDGKT, VI(Max)(V)=18, VI(Min)(V)=3.2, VO(V)=3
U6 U8 U10 U13 U15 U17: "Ultra Low Power 0.25 mA, RRO, Fully Differential Amplifier, 2.5 to 5.5 V, -40 to 125 degC, 8-pin SOP (DGK8), Green (RoHS & no Sb/Br)", Manufacturer="Texas Instruments", Offset Voltage Drift (+/-)(Max)(uV/Degrees Celsius=10, Supplier Part Number 1=296-30342-2-ND, 2nd Harmonic(dBc)=-128, 3rd Harmonic(dBc)=-137, BW @ Acl(MHz)=24, Code_JEDEC=MO-187, ComponentLink1Description="Manufacturer URL", ComponentLink1URL=http://www.ti.com/, ComponentLink2Description=Datasheet, ComponentLink2URL=http://www.ti.com/general/docs/lit/getliterature.tsp?genericPartNumber=THS4531&fileType=pdf, ComponentLink3Description="Package Specification", ComponentLink3URL=http://www.ti.com/litv/pdf/mpds028d, DatasheetVersion=SLOS358B, Eco-Plan="Green (RoHS & no Sb/Br)", Io(Typ)(mA)=26, Iq per channel(Max)(mA)=0.35, Mounting Technology="Surface Mount", Number of Channels=1, PackageDescription="8-Pin Thin Small Outline, Body 3 x 3 mm, Pitch 0.65 mm", PackageReference=DGK8, PackageVersion="4073329/E, 05/2006", PartNumber=THS4531IDGKR, Settling Time (0.1%)(Typ)(ns)=60, Slew Rate(Typ)(V/us)=15, SubFamily="Fully Differential Amplifier", Supplier 1=Digi-Key, Supplier 2=Digi-Key, Supplier 3=Digi-Key, Supplier 4=Mouser, Supplier Part Number 2=296-30342-1-ND, Supplier Part Number 3=296-30342-6-ND, Supplier Part Number 4=595-THS4531IDGKR, THD (Fc is 1 MHz)(Typ)(dB)=-107, Vio(Max)(mV)=1, Vn at Flatband(Typ)(nV/rtHz)=10, Vs(Max)(V)=5.5, Vs(Min)(V)=2.5
U19: "Imported", Manufacturer="Texas Instruments", PartNumber=TMS320F28379DPTPS, RefDes=RefDes, TYPE=TYPE
U22 U23: "17 V Input, 3A Synchronous Step-Down Regulator in SOT-23 with Advanced Eco-mode? 6-SOT -40 to 85", Package="TSOT-23 Texas Instruments", Digi-Key_Part_Number=296-43663-1-ND, Digi-Key_Purchase_URL=https://www.digikey.com/product-detail/en/texas-instruments/TPS563200DDCR/296-43663-1-ND/5864733?utm_source=snapeda&utm_medium=aggregator&utm_campaign=symbol, MF="Texas Instruments", MP=TPS563200DDCR, SnapEDA_Link=https://www.snapeda.com/parts/TPS563200DDCR/Texas%20Instruments/view-part/?ref=snap
L1 L2 L3 L4 L5 L6 L7 L8: Code_IEC=1005, Code_JEITA=0402, LatestRevisionDate=29-May-2009, LatestRevisionNote="IPC-7351 Footprint Added.", PackageDescription="Chip Inductor", PackageReference=0402-A, Published=8-Jun-2000, Publisher="Altium Limited"

## Via types
v1: diameter 50, hole 28, Top Layer to Bottom Layer, 4 vias
v2: diameter 160, hole 128, Top Layer to Bottom Layer, 3 vias
v3: diameter 28, hole 15, Top Layer to Bottom Layer, 1 vias

## Nets (pads, with @x,y where several pads share a name; then routed paths per layer and width w, separated by ;. In a path a pad name is that pad's centre, name@x,y a point inside that pad or via, vN(x,y) a via of type N, cw(c..) or ccw(c..) an arc to the next point about the centre after c; other vN are vias at no path point)
+1V2: C36.1 C149.2 L5.1 L6.2 R8.2
+3V3: C15.1 C23.1 C24.1 C56.1 C62.1 C63.1 C73.1 C76.1 C86.1 C89.1 C99.1 C102.1 C112.1 C115.1 C125.1 C141.2 L1.1 L2.1 L3.1 L7.2 R122.1 R123.1 R124.1 R125.2 R140.2 U6.3 U6.7 U8.3 U8.7 U10.3 U10.7 U13.3 U13.7 U15.3 U15.7 U17.3 U17.7
+5V: C37.1 C38.1 C39.1 C45.1 C58.1 C65.1 C78.1 C91.1 C104.1 C117.1 C144.2 C152.1 L8.2 R127.2 U1.8 U3.7 U4.2 U5.7 U7.8 U9.8 U11.8 U12.8 U14.8 U25.8 | length 365.8
  Top Layer w20: v1(1055,2975) 1215,2975
  Top Layer w60: L8.2 1055,2990 v1(1055,2975) 1055,2890.87 R127.2
+12V: C47.2 C48.2 C137.1 C138.2 C139.2 C142.2 C148.2 J1.1 J3.10 U2.2 U2.12 U22.3 U22.5 U23.3 U23.5 U24.3 U24.5 | length 2036.2
  Top Layer w20: v1(780,2820) v1@782.6,2822.6 ; U23.3 885,2822.6 885,2823.87 921.13,2860 U23.5
  Top Layer w30: v1@782.6,2822.6 U23.3
  Top Layer w50: 543.43,3426.85 613.43,3496.85
  Top Layer w60: J1.1 93.9,2760.47 93.9,3013.9 99.33,3019.33 ; 543.43,3426.85 506.85,3426.85 99.33,3019.33 ; 613.43,3496.85 J3.10 ; v1(780,2820) 580.67,3019.33 99.33,3019.33
-5V: C49.2 C60.1 C71.1 C84.1 C97.1 C110.1 C123.1 C156.1 L4.2 U1.4 U2.7 U7.4 U9.4 U11.4 U12.4 U14.4 U25.4
AGND: C20.2 C21.2 C22.2 C24.2 C37.2 C38.2 C39.2 C40.2 C41.2 C42.2 C43.2 C44.2 C45.2 C46.2 C47.1 C48.1 C49.1 C52.2 C53.2 C56.2 C58.2 C59.2 C60.2 C62.2 C63.2 C65.2 C69.2 C70.2 C71.2 C73.2 C76.2 C78.2 C82.2 C83.2 C84.2 C86.2 C89.2 C91.2 C95.2 C96.2 C97.2 C99.2 C102.2 C104.2 C108.2 C109.2 C110.2 C112.2 C115.2 C117.2 C121.2 C122.2 C123.2 C125.2 C128.2 C129.2 C130.2 C131.2 C132.2 C133.2 C134.1 C137.2 C138.1 C139.1 C141.1 C142.1 C144.1 C145.1 C146.1 C148.1 C149.1 C152.2 C156.2 J1.2 J1.3 J2.S J3.1 J3.2 J3.4 R4.1 R9.1 R11.1 R13.1 R15.1 R29.1 R30.1 R32.1 R34.1 R48.1 R50.1 R52.1 R66.1 R68.1 R70.1 R84.1 R86.1 R88.1 R102.1 R104.1 R106.1 R126.1 R128.1 R129.1 R130.1 R131.1 R132.1 R136.1 U2.9 U2.10 U2.13 U3.4 U4.4 U5.4 U6.6 U8.6 U10.6 U13.6 U15.6 U17.6 U19.32 U19.33 U19.34 U19.50 U19.51 U19.52 U22.1 U23.1 U24.1 U25.3 U25.5 | length 85
  Top Layer w20: v3(795,2940) 795,2920 817.6,2897.4 U23.1
  other v1: 920,2620
AIN1: C150.1 J3.9 R21.1 | length 465.6
  Top Layer w20: J3.9 841.57,3201.57 R21.1
  Bottom Layer w20: J3.9 841.14,3201.57 C150.1
AIN1N: C51.2 R24.2 U19.42
AIN1P: C51.1 R17.2 U19.43
AIN2: C151.1 J3.5 R41.1 | length 659.6
  Top Layer w20: J3.5 R41.1
  Bottom Layer w20: J3.5 C151.1
AIN2N: C68.2 R44.2
AIN2P: C68.1 R37.2 U19.46
AIN3: C153.1 J3.8 R59.1 | length 463
  Top Layer w20: J3.8 R59.1
  Bottom Layer w20: J3.8 C153.1
AIN3N: C81.2 R62.2 U19.40 U19.47
AIN3P: C81.1 R55.2 U19.41
AIN4: C155.1 J3.7 R77.1 | length 462.5
  Top Layer w20: J3.7 844.29,3595.28 R77.1
  Bottom Layer w20: J3.7 844.29,3595.28 C155.1
AIN4N: C94.2 R80.2 U19.57
AIN4P: C94.1 R73.2 U19.56
AIN5: C157.1 J3.3 R95.1 | length 659.1
  Top Layer w20: J3.3 R95.1
  Bottom Layer w20: J3.3 C157.1
AIN5N: C107.2 R98.2 U19.30
AIN5P: C107.1 R91.2 U19.31
AIN6: C158.1 J3.6 R113.1 | length 463.5
  Top Layer w20: J3.6 R113.1
  Bottom Layer w20: J3.6 841.69,3792.13 C158.1
AIN6N: C120.2 R116.2 U19.59
AIN6P: C120.1 R109.2 U19.58
DGND: C1.2 C2.2 C3.2 C4.2 C5.2 C6.2 C7.2 C8.2 C9.2 C10.2 C11.2 C12.2 C13.2 C14.2 C15.2 C17.2 C18.2 C19.2 C23.2 C26.2 C27.2 C28.2 C29.2 C30.2 C31.2 C32.2 C33.2 C34.2 C35.2 C36.2 C57.1 P1.4 P1.8 P1.10 P1.12 R121.2 S1.1 S1.3 S1.4 U19.177
NetC16_1: C16.1 R1.1 R15.2 R16.1
NetC16_2: C16.2 R27.1
NetC25_1: C25.1 L4.1 U2.8
NetC25_2: C25.2 U2.11
NetC41_1: C41.1 C42.1 R5.1 U3.3 U5.3
NetC43_1: C43.1 U4.5
NetC44_1: C44.1 R6.2
NetC46_1: C46.1 R7.2
NetC50_1: C50.1 R16.2 U6.1
NetC50_2: C50.2 R26.2 U6.8
NetC52_1: C52.1 R20.2 U1.5
NetC53_1: C53.1 R22.2 U1.3 | length 499.1
  Top Layer w20: R22.2 1555,3205
NetC54_1: C54.1 R21.2 R22.1 | length 69.1
  Top Layer w40: R21.2 R22.1
NetC54_2: C54.2 R12.2 R19.1 U1.1
NetC55_1: C55.1 R19.2 R20.1
NetC55_2: C55.2 R14.2 R25.1 U1.7
NetC66_1: C66.1 R30.2 R31.1 R36.1
NetC66_2: C66.2 R47.1
NetC67_1: C67.1 R36.2 U8.1
NetC67_2: C67.2 R46.2 U8.8
NetC69_1: C69.1 R40.2 U9.5
NetC70_1: C70.1 R42.2 U9.3 | length 494.1
  Top Layer w20: R42.2 1550,3300
NetC74_1: C74.1 R41.2 R42.1 | length 69.1
  Top Layer w40: R41.2 R42.1
NetC74_2: C74.2 R33.2 R39.1 U9.1
NetC75_1: C75.1 R39.2 R40.1
NetC75_2: C75.2 R35.2 R45.1 U9.7
NetC79_1: C79.1 R48.2 R49.1 R54.1
NetC79_2: C79.2 R65.1
NetC80_1: C80.1 R54.2 U10.1
NetC80_2: C80.2 R64.2 U10.8
NetC82_1: C82.1 R58.2 U7.5
NetC83_1: C83.1 R60.2 U7.3 | length 487.4
  Top Layer w20: R60.2 1543.43,3398.43
NetC87_1: C87.1 R59.2 R60.1 | length 69.1
  Top Layer w40: R59.2 R60.1
NetC87_2: C87.2 R51.2 R57.1 U7.1
NetC88_1: C88.1 R57.2 R58.1
NetC88_2: C88.2 R53.2 R63.1 U7.7
NetC92_1: C92.1 R66.2 R67.1 R72.1
NetC92_2: C92.2 R83.1
NetC93_1: C93.1 R72.2 U13.1
NetC93_2: C93.2 R82.2 U13.8
NetC95_1: C95.1 R76.2 U14.5
NetC96_1: C96.1 R78.2 U14.3 | length 489.6
  Top Layer w20: R78.2 1545,3595
NetC100_1: C100.1 R77.2 R78.1 | length 69.1
  Top Layer w40: R77.2 R78.1
NetC100_2: C100.2 R69.2 R75.1 U14.1
NetC101_1: C101.1 R75.2 R76.1
NetC101_2: C101.2 R71.2 R81.1 U14.7
NetC105_1: C105.1 R84.2 R85.1 R90.1
NetC105_2: C105.2 R101.1
NetC106_1: C106.1 R90.2 U15.1
NetC106_2: C106.2 R100.2 U15.8
NetC108_1: C108.1 R94.2 U12.5
NetC109_1: C109.1 R96.2 U12.3 | length 489.6
  Top Layer w20: R96.2 1545,3693.7
NetC113_1: C113.1 R95.2 R96.1 | length 69.1
  Top Layer w40: R95.2 R96.1
NetC113_2: C113.2 R87.2 R93.1 U12.1
NetC114_1: C114.1 R93.2 R94.1
NetC114_2: C114.2 R89.2 R99.1 U12.7
NetC118_1: C118.1 R102.2 R103.1 R108.1
NetC118_2: C118.2 R119.1
NetC119_1: C119.1 R108.2 U17.1
NetC119_2: C119.2 R118.2 U17.8
NetC121_1: C121.1 R112.2 U11.5
NetC122_1: C122.1 R114.2 U11.3 | length 474.6
  Top Layer w20: R114.2 1530,3792.13
NetC126_1: C126.1 R113.2 R114.1 | length 69.1
  Top Layer w40: R113.2 R114.1
NetC126_2: C126.2 R105.2 R111.1 U11.1
NetC127_1: C127.1 R111.2 R112.1
NetC127_2: C127.2 R107.2 R117.1 U11.7
NetC140_1: C140.1 U22.6
NetC140_2: C140.2 L7.1 U22.2
NetC143_1: C143.1 U23.6 | length 78
  Top Layer w20: C143.1 945.87,2900.94 U23.6
NetC143_2: C143.2 L8.1 U23.2 | length 369.3
  Top Layer w20: U23.2 810.71,2860 760,2910.71 760,2953.08 780.92,2974 874.9,2974 C143.2 875,3063.7 L8.1
NetC145_2: C145.2 U2.6
NetC146_2: C146.2 R3.2 U2.1
NetC147_1: C147.1 L6.1 U24.2
NetC147_2: C147.2 U24.6
NetC150_2: C150.2 R10.1 | length 69.1
  Bottom Layer w20: C150.2 R10.1
NetC151_2: C151.2 R134.1 | length 69.1
  Bottom Layer w20: C151.2 R134.1
NetC153_2: C153.2 R135.1 | length 69.6
  Bottom Layer w20: C153.2 R135.1
NetC154_1: C154.1 R133.2 U25.1
NetC155_2: C155.2 R137.1 | length 69.1
  Bottom Layer w20: C155.2 R137.1
NetC157_2: C157.2 R138.1 | length 69.7
  Bottom Layer w20: C157.2 983.27,3693.7 R138.1
NetC158_2: C158.2 R139.1 | length 69.1
  Bottom Layer w20: C158.2 R139.1
NetJ2_TB: J2.TB P2.1
NetP1_5: P1.5 R122.2
NetP1_13: P1.13 R123.2
NetP1_14: P1.14 R124.2
NetR1_2: R1.2 R17.1 R18.2
NetR2_1: R2.1 R4.2 U2.5
NetR2_2: R2.2 U2.4
NetR3_1: R3.1 U2.3
NetR8_1: R8.1 R9.2 U24.4
NetR10_2: R10.2 R133.1 R134.2 R135.2 R137.2 R138.2 R139.2 U25.2 | length 590
  Bottom Layer w40: R10.2 R134.2 R137.2 R138.2 R139.2
NetR11_2: R11.2 R12.1 U1.2
NetR13_2: R13.2 R14.1 U1.6
NetR18_1: R18.1 U6.4
NetR23_1: R23.1 U6.5
NetR23_2: R23.2 R24.1 R27.2
NetR25_2: R25.2 R26.1
NetR31_2: R31.2 R37.1 R38.2
NetR32_2: R32.2 R33.1 U9.2
NetR34_2: R34.2 R35.1 U9.6
NetR38_1: R38.1 U8.4
NetR43_1: R43.1 U8.5
NetR43_2: R43.2 R44.1 R47.2
NetR45_2: R45.2 R46.1
NetR49_2: R49.2 R55.1 R56.2
NetR50_2: R50.2 R51.1 U7.2
NetR52_2: R52.2 R53.1 U7.6
NetR56_1: R56.1 U10.4
NetR61_1: R61.1 U10.5
NetR61_2: R61.2 R62.1 R65.2
NetR63_2: R63.2 R64.1
NetR67_2: R67.2 R73.1 R74.2
NetR68_2: R68.2 R69.1 U14.2
NetR70_2: R70.2 R71.1 U14.6
NetR74_1: R74.1 U13.4
NetR79_1: R79.1 U13.5
NetR79_2: R79.2 R80.1 R83.2
NetR81_2: R81.2 R82.1
NetR85_2: R85.2 R91.1 R92.2
NetR86_2: R86.2 R87.1 U12.2
NetR88_2: R88.2 R89.1 U12.6
NetR92_1: R92.1 U15.4
NetR97_1: R97.1 U15.5
NetR97_2: R97.2 R98.1 R101.2
NetR99_2: R99.2 R100.1
NetR103_2: R103.2 R109.1 R110.2
NetR104_2: R104.2 R105.1 U11.2
NetR106_2: R106.2 R107.1 U11.6
NetR110_1: R110.1 U17.4
NetR115_1: R115.1 U17.5
NetR115_2: R115.2 R116.1 R119.2
NetR117_2: R117.2 R118.1
NetR125_1: R125.1 R126.2 U22.4
NetR127_1: R127.1 R128.2 U23.4 | length 107.3
  Top Layer w20: U23.4 952.44,2819.57 v1(1055.43,2819.57)
NetR129_2: R129.2 U19.1 U19.2 U19.4 U19.5 U19.6 U19.7 U19.8 U19.9 U19.10 U19.12 U19.13 U19.14 U19.18 U19.19 U19.22 U19.23 U19.24 U19.160 U19.161 U19.162 U19.163 U19.164 U19.165 U19.166 U19.167
NetR130_2: R130.2 U19.25 U19.27 U19.28 U19.63 U19.64 U19.65 U19.66 U19.67 U19.69 U19.70 U19.71 U19.83 U19.84 U19.85 U19.86 U19.87 U19.89 U19.90 U19.93 U19.113 U19.115 U19.128 U19.129 U19.130 U19.131
NetR131_2: R131.2 U19.17 U19.118 U19.142 U19.143 U19.144 U19.145 U19.146 U19.148 U19.149 U19.150 U19.151 U19.154 U19.155 U19.156 U19.157 U19.170 U19.171 U19.172 U19.173 U19.174 U19.175 U19.176
NetR132_2: R132.2 U19.94 U19.95 U19.96 U19.97 U19.98 U19.100 U19.101 U19.102 U19.103 U19.104 U19.105 U19.107 U19.108 U19.109 U19.110 U19.111 U19.112 U19.132 U19.133 U19.134 U19.135 U19.136 U19.139 U19.140 U19.141
NetU25_6: U25.6 U25.7
RESET: C57.2 R140.1 S1.2 U19.124
Sum_Out: C154.2 J2.T R136.2
TCK: P1.9 P1.11 U19.81
TDI: P1.3 U19.77
TDO: P1.7 U19.78
TMS: P1.1 U19.80
TRST: P1.2 R121.1 U19.79
VDD: C26.1 C27.1 C28.1 C29.1 C30.1 C31.1 C32.1 C33.1 C34.1 C35.1 C134.2 L5.2 U19.16 U19.21 U19.61 U19.72 U19.76 U19.117 U19.126 U19.137 U19.153 U19.158 U19.169
VDDA: C20.1 C21.1 C22.1 L3.2 U19.36 U19.54
VDDIO: C1.1 C2.1 C3.1 C4.1 C5.1 C6.1 C7.1 C8.1 C9.1 C10.1 C11.1 C12.1 C13.1 C14.1 L1.2 U19.3 U19.11 U19.15 U19.20 U19.26 U19.62 U19.68 U19.75 U19.82 U19.88 U19.91 U19.99 U19.106 U19.114 U19.116 U19.119 U19.127 U19.138 U19.147 U19.152 U19.159 U19.168
VDDOSC: C17.1 C18.1 C19.1 L2.2 U19.120 U19.122 U19.125
VOCM: C59.1 C128.1 C129.1 C130.1 C131.1 C132.1 C133.1 R28.1 R29.2 U6.2 U8.2 U10.2 U13.2 U15.2 U17.2
VREF: C40.1 R5.2 R28.2 U4.6
VREFHIA: R6.1 U3.2 U3.6 U19.35 U19.37
VREFHIB: R7.1 U5.2 U5.6 U19.53 U19.55
VSSOSC: C135.1 C136.1
X1: C135.2 R120.1 U19.123 XTALA.1
X2: C136.2 R120.2 U19.121 XTALA.2
pads on no net: J2.R J2.RB P1.6 U3.1 U3.5 U3.8 U4.1 U4.3 U4.7 U4.8 U5.1 U5.5 U5.8 U19.29 U19.38 U19.39 U19.44 U19.45 U19.48 U19.49 U19.60 U19.73 U19.74 U19.92 U19.V
copper on no net:
  other v2: 6515,1750 6515,1950 6515,2450

## Text inside footprints (layer, text, board x,y; h text height)
P1: Top Overlay "2" at 11985,510 h50 r90; Top Overlay "1" at 12085,510 h50 r90; Top Overlay "14" at 11985,1310 h50 r90; Top Overlay "13" at 12085,1310 h50 r90
U19: Top Overlay "TMS320F28379D" at 10135,1435 h50